# Altium PCB V2.pcbdoc
Units mil, origin at the board's own origin, x right, y up, seen from the top; angles counter-clockwise.
Board outline 2425 x 2622.79 mil, 2 copper layers (Top Layer, Bottom Layer); 56 components, 61 nets, 216 pads, 43 vias.
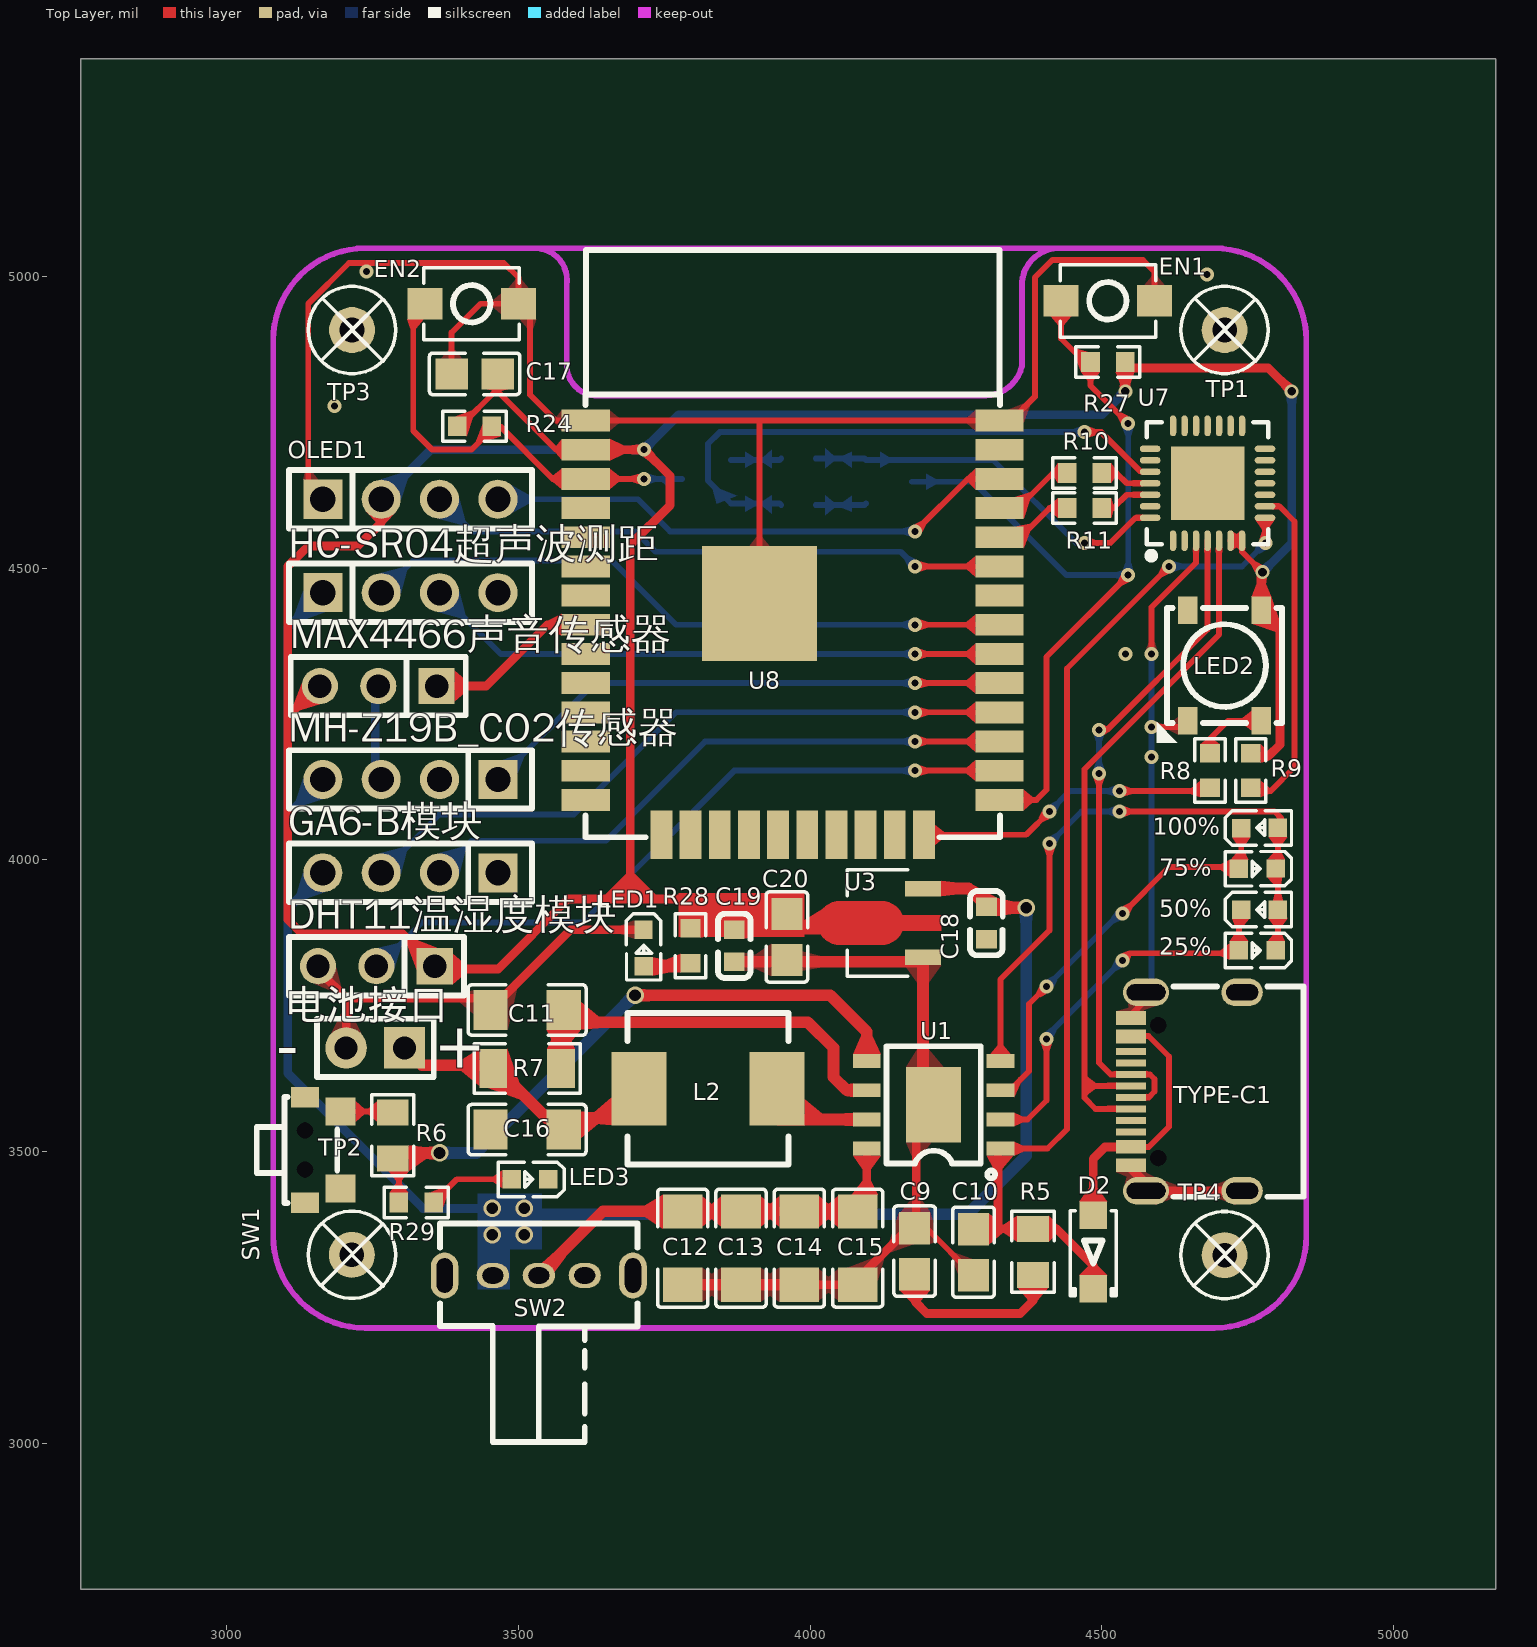
[diagram p0: Top Layer view]
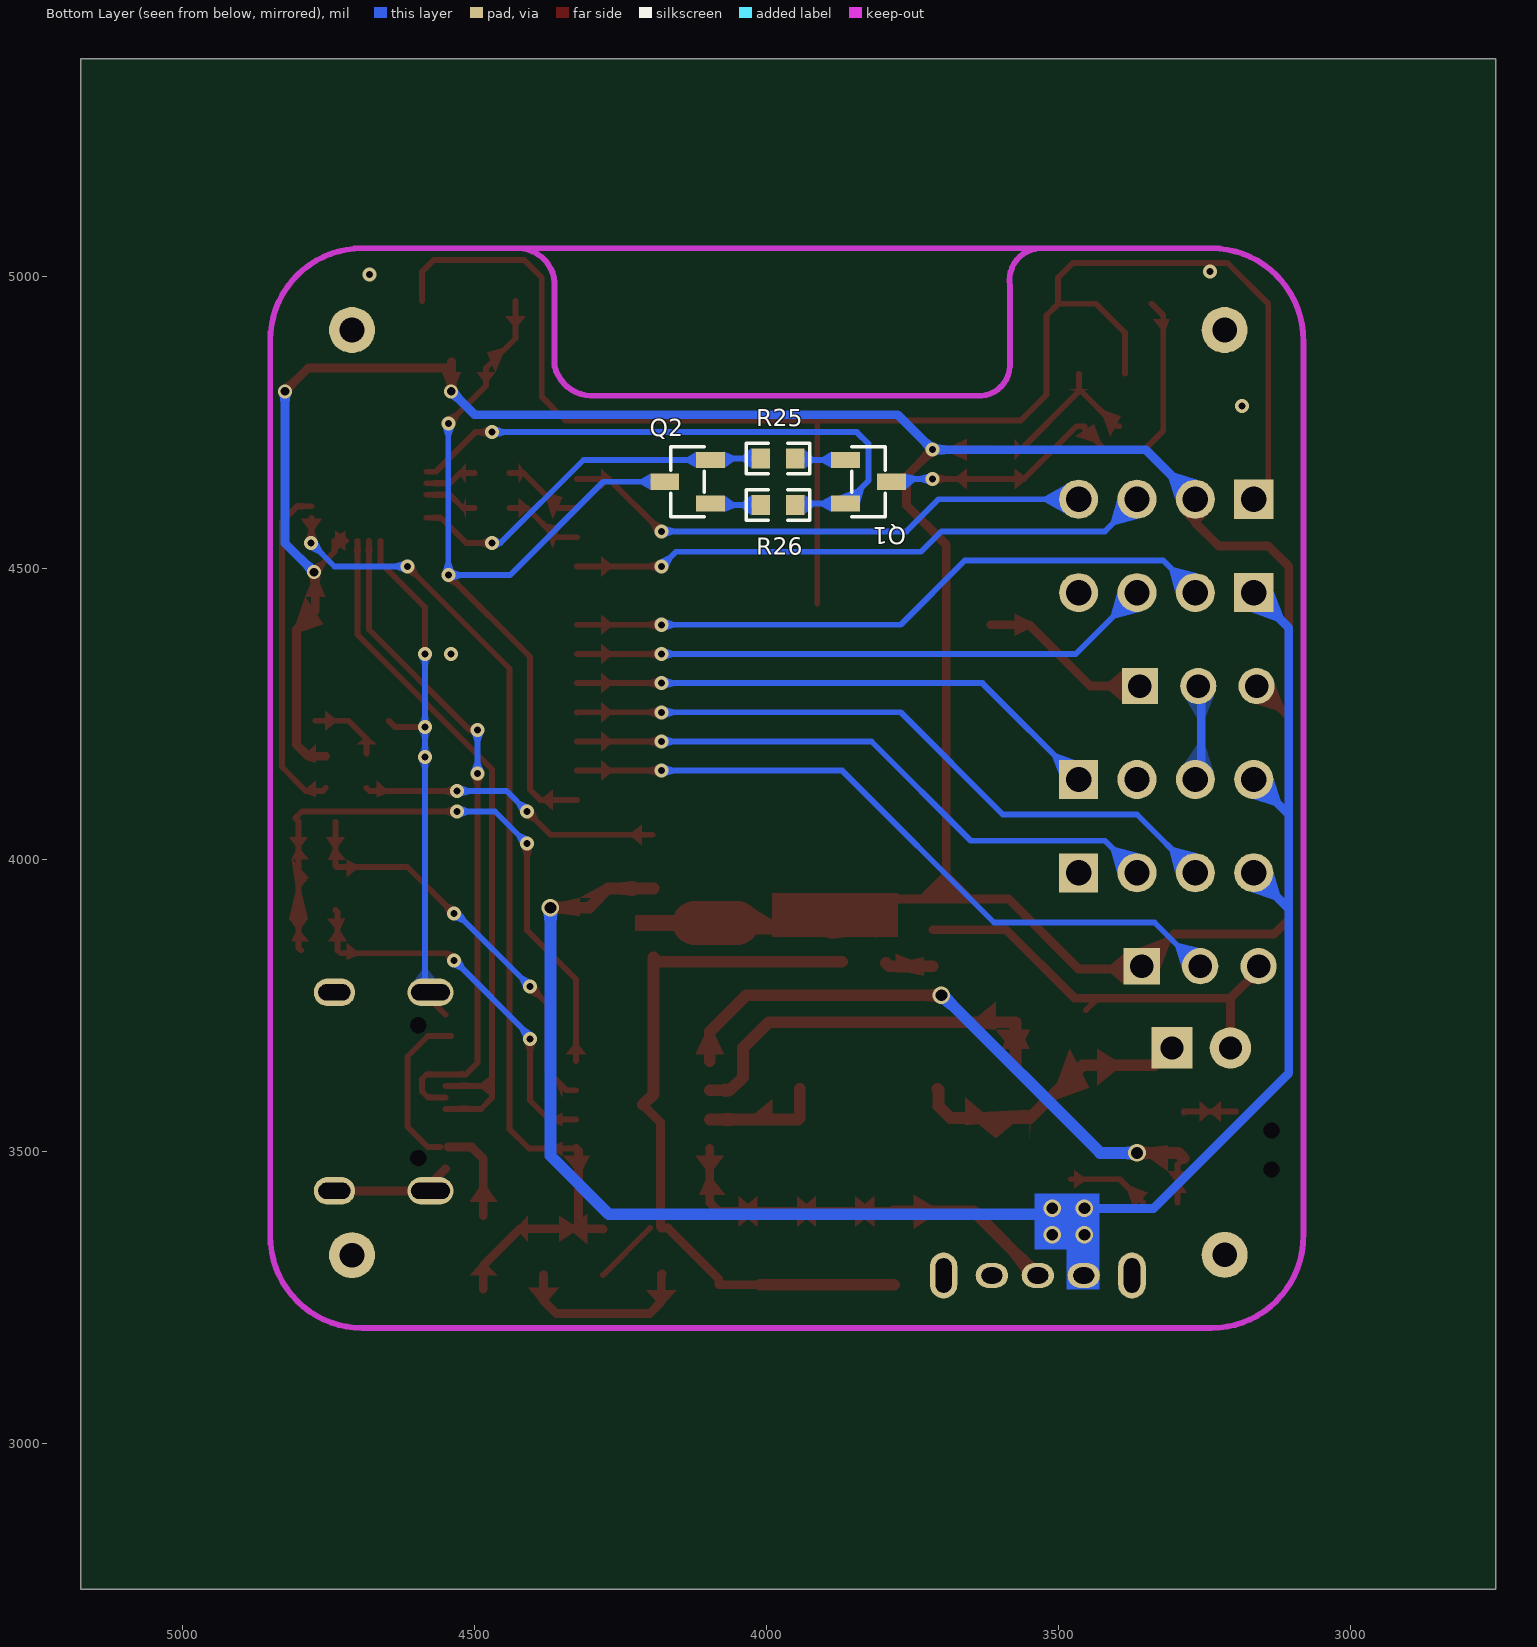
[diagram p1: Bottom Layer view, seen from below]

## Layer stack, top to bottom
Top Layer: signal copper (thickness not stored)
Dielectric: dielectric 12.6, FR-4, Dk 4.8
Bottom Layer: signal copper (thickness not stored)

## Board outline
5175,2750 2750,2750 2750,5372.79 5175,5372.79

## Components (designator, comment, footprint, x,y, rotation, side; value= is the part's Value field where it differs from the comment)
25% "19-217/GHC-YR1S2/3T" LED0603-RD 4766.1,3844.95 r180 top
50% "19-217/GHC-YR1S2/3T" LED0603-RD 4770,3914.53 r0 top
75% "19-217/GHC-YR1S2/3T" LED0603-RD 4766.1,3984.95 r180 top
100% "19-217/GHC-YR1S2/3T" LED0603-RD 4770,4054.53 r0 top
C9 "GRM21BR61H106KE43L" C0805 4179.07,3329.61 r270 top
C10 "GRM21BR61H106KE43L" C0805 4280,3327.79 r90 top
C11 "C3216X5R1V226MTJ00E" C1206 3515,3742.79 r0 top
C12 "C3216X5R1V226MTJ00E" C1206 3781.45,3334.61 r90 top
C13 "C3216X5R1V226MTJ00E" C1206 3881.45,3334.61 r90 top
C14 "C3216X5R1V226MTJ00E" C1206 3981.45,3334.61 r90 top
C15 "C3216X5R1V226MTJ00E" C1206 4081.45,3334.61 r90 top
C16 "C3216X5R1V226MTJ00E" C1206 3515,3537.79 r0 top
C17 "GRM21BR61H106KE43L" C0805 3425,4832.79 r180 top
C18 "104" C0603 4302.07,3891.75 r90 top
C19 "104" C0603 3870,3852.79 r90 top
C20 "GRM21BR61H106KE43L" C0805 3960,3867.79 r90 top
D2 "SS14_C2909920" SOD-123FL_L2.8-W1.8-LS3.7-RD 4485,3327.79 r90 top
DHT11温湿度模块 "B-2200S03P-A120" HDR-TH_3P-P2.54-V-F 3256.73,3817.79 r180 top
EN1 "TSA343G00-250J2" SW-SMD_L4.0-W2.9-LS5.0 4510,4957.79 r0 top
EN2 "TSA343G00-250J2" SW-SMD_L4.0-W2.9-LS5.0 3420,4952.79 r0 top
GA6-B模块 "2.54-1*4P母" HDR-TH_4P-P2.54-V-F 3315,3977.79 r180 top
HC-SR04超声波测距 "2.54-1*4P母" HDR-TH_4P-P2.54-V-F 3315,4457.79 r0 top
L2 "FXL0618-1R0-M" IND-SMD_L7.0-W6.6 3825,3607.79 r180 top
LED1 "19-217/GHC-YR1S2/3T" LED0603-RD 3714.58,3848.89 r270 top
LED2 "WS2812B-V5/W" LED-SMD_L5.0-W5.0-P3.20-LS5.4-TL 4710,4332.79 r270 top
LED3 "19-217/GHC-YR1S2/3T" LED0603-RD 3520,3452.79 r180 top
MAX4466声音传感器 "B-2200S03P-A120" HDR-TH_3P-P2.54-V-F 3260,4297.79 r180 top
MH-Z19B_CO2传感器 "2.54-1*4P母" HDR-TH_4P-P2.54-V-F 3315,4137.79 r180 top
OLED1 "2.54-1*4P母" HDR-TH_4P-P2.54-V-F 3315,4617.79 r0 top
Q1 "S8050" SOT-23-3_L2.9-W1.3-P1.90-LS2.4-BR 3825,4647.79 r0 bottom
Q2 "S8050" SOT-23-3_L2.9-W1.3-P1.90-LS2.4-BR 4135,4647.79 r180 bottom
R5 "0805W8F200KT5E" R0805 4381.88,3328.35 r90 top
R6 "0805W8F1002T5E_C17414" R0805 3285,3527.79 r270 top
R7 "1206W4F500LT5E" R1206 3515,3642.79 r180 top
R8 "0603WAF0000T5E" R0603 4685,4152.79 r270 top
R9 "0603WAF4701T5E" R0603 4755,4152.79 r270 top
R10 "0603WAF1001T5E" R0603 4470,4662.79 r180 top
R11 "0603WAF1001T5E" R0603 4470,4602.79 r180 top
R24 "0603WAF1002T5E" R0603 3425,4742.79 r0 top
R25 "0603WAF1002T5E" R0603 3980,4687.79 r0 bottom
R26 "0603WAF1002T5E" R0603 3980,4607.79 r180 bottom
R27 "0603WAF1002T5E" R0603 4510,4852.79 r0 top
R28 "0603WAF1001T5E" R0603 3795,3852.79 r90 top
R29 "0603WAF200JT5E" R0603 3325,3412.79 r180 top
SW1 "TS24CA" SW-SMD_TS24CA 3165,3502.79 r90 top
SW2 "SK-12D02-VG5_C136722" SW-TH_SK-12D02-VG5 3535,3287.79 r0 top
TP1 "M2螺丝" M2螺丝 4710,4907.79 r0 top
TP2 "M2螺丝" M2螺丝 3214.8,3323.14 r0 top
TP3 "M2螺丝" M2螺丝 3215,4907.79 r0 top
TP4 "M2螺丝" M2螺丝 4710,3322.79 r0 top
TYPE-C1 "KH-TYPE-C-16P" USB-C-SMD_KH-TYPE-C-16P 4645,3602.79 r90 top
U1 "IP5306" ESOP-8_L4.9-W3.9-P1.27-LS6.0-BL-EP 4211.59,3580.2 r90 top
U3 "AMS1117-3.3_C880752" SOT-89-3_L4.5-W2.5-P1.50-LS4.2-BR 4139.95,3891.77 r0 top
U7 "CP2102-GMR" WQFN-28_L5.0-W5.0-P0.50-BL-EP3.2 4680.88,4645.2 r0 top
U8 "ESP32-WROOM-32D" WIFIM-SMD_ESP32-WROOM-32D 3970,4397.79 r270 top
电池接口 "826629-2" HDR-TH_2P-P2.54-V-M-1 3255,3677.79 r180 top

## Footprints (in the part's own frame and the unit in brackets; to place one, negate y for a bottom-side part, rotate by r counter-clockwise, add the part's x,y. Pads: shape width x height; smd on the part's side, far side on the other; paste and mask are expansions set on the pad)
C0603 [mm]
  rect 0.8x0.9 smd paste+0 mask+0.051: 1(-0.7,0) 2(0.7,0)
  silkscreen extent -1.41,-0.71 1.39,0.72
C0805 [mm]
  rect 1.41x1.35 smd paste-100 mask+0.051: 1(-1,0) 2(1,0)
  silkscreen extent -1.96,-0.9 1.96,0.9
C1206 [mm]
  rect 1.485x1.728 smd paste-100 mask+0.051: 1(-1.593,0) 2(1.593,0)
  silkscreen extent -2.56,-1.09 2.56,1.09
ESOP-8_L4.9-W3.9-P1.27-LS6.0-BL-EP [mm]
  rect 0.6x1.2 smd paste+0 mask+0.051: 1(-1.905,-2.908) 2(-0.635,-2.908) 3(0.635,-2.908) 4(1.905,-2.908) 5(1.905,2.908) 6(0.635,2.908) 7(-0.635,2.908) 8(-1.905,2.908)
  rect 3.3x2.4 smd paste+0 mask+0.051: 9(0,0)
  silkscreen extent -3.2,-2.67 2.55,2.05
HDR-TH_2P-P2.54-V-M-1 [mm]
  rect 1.8x1.8 hole 1 paste+0 mask+0.051: 1(-1.27,0)
  round 1.8 hole 1 paste+0 mask+0.051: 2(1.27,0)
  silkscreen extent -2.54,-1.27 2.54,1.27
HDR-TH_3P-P2.54-V-F [mil]
  rect 62x62 hole 40.16 paste+0 mask+2: 1(-100,0)
  round 62 hole 40.16 paste+0 mask+2: 2(0,0) 3(100,0)
  silkscreen extent -150,-50 150,50
HDR-TH_4P-P2.54-V-F [mm]
  rect 1.7x1.7 hole 1.1 paste+0 mask+0.051: 1(-3.81,0)
  round 1.7 hole 1.1 paste+0 mask+0.051: 2(-1.27,0) 3(1.27,0) 4(3.81,0)
  silkscreen extent -5.29,-1.27 5.29,1.27
IND-SMD_L7.0-W6.6 [mm]
  rect 2.4x3.2 smd paste+0 mask+0.051: 1(-3,0) 2(3,0)
  silkscreen extent -3.5,-3.3 3.5,3.3
LED0603-RD [mm]
  rect 0.8x0.8 smd paste+0 mask+0.051: 1(-0.799,-0.003) 2(0.799,0.003)
  silkscreen extent -1.49,-0.75 1.39,0.76
LED-SMD_L5.0-W5.0-P3.20-LS5.4-TL [mm]
  rect 1.2x0.85 smd paste+0 mask+0.051: 1(-2.4,1.6) 2(-2.4,-1.6) 3(2.4,1.6) 4(2.4,-1.6)
  silkscreen extent -2.5,-2.95 3.35,2.5
M2螺丝 [mm]
  round 2 hole 1.07 mask+0.051: 1(0,0)
  silkscreen extent -1.9,-1.9 1.9,1.9
R0603 [mil]
  rect 31.75x34.02 smd paste-3937.01 mask+2: 1(-29.66,0) 2(29.66,0)
  silkscreen extent -55,-26 55,26
R0805 [mm]
  rect 1.133x1.377 smd paste-100 mask+0.051: 1(-1,0) 2(1,0)
  silkscreen extent -1.76,-0.92 1.76,0.92
R1206 [mil]
  rect 47.54x66.97 smd paste-3937.01 mask+2: 1(-58.22,0) 2(58.22,0)
  silkscreen extent -91,-42 91,42
SOD-123FL_L2.8-W1.8-LS3.7-RD [mm]
  rect 1.2x1.2 smd paste+0 mask+0.051: 1(-1.6,0) 2(1.6,0)
  silkscreen extent -1.9,-1 1.8,1
SOT-23-3_L2.9-W1.3-P1.90-LS2.4-BR [mm]
  rect 1.25x0.7 smd paste+0 mask+0.051: 1(1,-0.95) 2(1,0.95) 3(-1,0)
  silkscreen extent -0.73,-1.53 0.73,1.53
SOT-89-3_L4.5-W2.5-P1.50-LS4.2-BR [mm]
  rect 1.575x0.672 smd paste+0 mask+0.051: 1(1.356,-1.5) 3(1.356,1.5)
  Top Layer region: -2.283,0.95 -0.429,0.95 -0.384,0.949 -0.34,0.946 -0.296,0.94 -0.252,0.933 -0.208,0.924 -0.165,0.912 -0.123,0.899 -0.081,0.884 -0.04,0.866 0,0.847 0.04,0.826 0.078,0.803 0.115,0.779 0.151,0.752 0.185,0.724 0.219,0.695 0.251,0.664 0.281,0.631 0.31,0.597 0.337,0.562 0.362,0.525 0.386,0.488 0.408,0.449 0.428,0.409 0.447,0.33 2.144,0.33 2.144,-0.33 0.447,-0.33 0.428,-0.409 0.408,-0.449 0.386,-0.488 0.362,-0.526 0.337,-0.562 0.31,-0.597 0.281,-0.631 0.251,-0.664 0.219,-0.695 0.185,-0.725 0.151,-0.753 0.115,-0.779 0.078,-0.804 0.04,-0.827 0,-0.848 -0.04,-0.867 -0.081,-0.884 -0.123,-0.899 -0.165,-0.913 -0.208,-0.924 -0.252,-0.934 -0.296,-0.941 -0.34,-0.946 -0.384,-0.949 -0.429,-0.95 -2.283,-0.95 -2.328,-0.949 -2.372,-0.946 -2.416,-0.941 -2.46,-0.934 -2.504,-0.924 -2.547,-0.913 -2.589,-0.899 -2.631,-0.884 -2.672,-0.867 -2.713,-0.848 -2.752,-0.827 -2.79,-0.804 -2.827,-0.779 -2.863,-0.753 -2.898,-0.725 -2.931,-0.695 -2.963,-0.664 -2.993,-0.631 -3.022,-0.597 -3.049,-0.562 -3.075,-0.526 -3.098,-0.488 -3.12,-0.449 -3.141,-0.409 -3.159,-0.369 -3.175,-0.327 -3.189,-0.285 -3.202,-0.242 -3.212,-0.199 -3.22,-0.155 -3.227,-0.111 -3.231,-0.067 -3.233,-0.022 -3.233,0.022 -3.231,0.067 -3.227,0.111 -3.22,0.155 -3.212,0.199 -3.202,0.242 -3.189,0.285 -3.175,0.327 -3.159,0.369 -3.141,0.409 -3.12,0.449 -3.098,0.488 -3.075,0.525 -3.049,0.562 -3.022,0.597 -2.993,0.631 -2.963,0.664 -2.931,0.695 -2.898,0.724 -2.863,0.752 -2.827,0.779 -2.79,0.803 -2.752,0.826 -2.713,0.847 -2.672,0.866 -2.631,0.884 -2.589,0.899 -2.547,0.912 -2.504,0.924 -2.46,0.933 -2.416,0.94 -2.372,0.946 -2.328,0.949
  silkscreen extent -1.95,-2.33 0.7,2.33
SW-SMD_L4.0-W2.9-LS5.0 [mm]
  rect 1.53x1.36 smd paste+0 mask+0.051: 1(-2.035,0) 2(2.035,0)
  silkscreen extent -2.08,-1.58 2.08,1.58
SW-SMD_TS24CA [mm]
  rect 0.9x1.2 smd paste+0 mask+0.051: 1(-2.3,0.775) 2(2.3,0.775)
  rect 1.2x1.3 smd paste+0 mask+0.051: 3(-1.675,-0.775) 4(1.675,-0.775)
  Multi-Layer board cut-out: -0.85,0.425 -0.698,0.46 -0.576,0.557 -0.509,0.697 -0.509,0.853 -0.576,0.993 -0.698,1.09 -0.85,1.125 -0.85,1.125 -1.002,1.09 -1.124,0.993 -1.191,0.853 -1.191,0.697 -1.124,0.557 -1.002,0.46 -0.85,0.425
  Multi-Layer board cut-out: 0.85,0.425 1.002,0.46 1.124,0.557 1.191,0.697 1.191,0.853 1.124,0.993 1.002,1.09 0.85,1.125 0.85,1.125 0.698,1.09 0.576,0.993 0.509,0.853 0.509,0.697 0.576,0.557 0.698,0.46 0.85,0.425
  silkscreen extent -2.3,-0.62 2.3,2.88
SW-TH_SK-12D02-VG5 [mm]
  oval 1.4x1.1 hole 0.7 slot 0.9 at 0 deg copper offset 0,0.001 paste+0 mask+0.051: 1(-2,-0.001)
  oval 1.4x1.1 hole 0.7 slot 0.9 at 0 deg paste+0 mask+0.051: 2(0,0)
  oval 1.4x1.1 hole 0.7 slot 0.9 at 0 deg copper offset 0,-0.001 paste+0 mask+0.051: 3(2,0.001)
  oval 1.2x2 hole 0.7 slot 1.5 at 90 deg copper offset 0.001,0 paste+0 mask+0.051: 4(4.099,0)
  oval 1.2x2 hole 0.7 slot 1.5 at 90 deg copper offset 0,0 paste+0 mask+0.051: 5(-4.1,0)
  silkscreen extent -4.3,-7.25 4.3,2.27
USB-C-SMD_KH-TYPE-C-16P [mm]
  oval 1.2x2 hole 0.7 slot 1.7 at 90 deg paste+0 mask+0.051: 1(-4.32,1.765) 2(4.32,1.765)
  oval 1.2x1.8 hole 0.7 slot 1.4 at 90 deg paste+0 mask+0.051: 3(-4.32,-2.415) 4(4.32,-2.415)
  rect 0.3x1.3 smd paste-100 mask+0.05: A1(-3.35,2.415) A4(-2.55,2.415) A5(-1.25,2.415) A6(-0.25,2.415) A7(0.25,2.415) A8(1.25,2.415) A9(2.55,2.415) A12(3.35,2.415) B1(3.05,2.415) B4(2.25,2.415) B5(1.75,2.415) B6(0.75,2.415) B7(-0.75,2.415) B8(-1.75,2.415) B9(-2.25,2.415) B12(-3.05,2.415)
  Multi-Layer board cut-out: -2.89,0.885 -2.738,0.92 -2.616,1.017 -2.549,1.157 -2.549,1.313 -2.616,1.453 -2.738,1.55 -2.89,1.585 -2.89,1.585 -3.042,1.55 -3.164,1.453 -3.231,1.313 -3.231,1.157 -3.164,1.017 -3.042,0.92 -2.89,0.885
  Multi-Layer board cut-out: 2.89,0.885 3.042,0.92 3.164,1.017 3.231,1.157 3.231,1.313 3.164,1.453 3.042,1.55 2.89,1.585 2.89,1.585 2.738,1.55 2.616,1.453 2.549,1.313 2.549,1.157 2.616,1.017 2.738,0.92 2.89,0.885
  silkscreen extent -4.57,-5.08 4.57,0.57
WIFIM-SMD_ESP32-WROOM-32D [mm]
  rect 0.95x2.1 smd paste+0 mask+0.051: 1(-9.015,-9) 2(-7.745,-9) 3(-6.475,-9) 4(-5.205,-9) 5(-3.935,-9) 6(-2.665,-9) 7(-1.395,-9) 8(-0.125,-9) 9(1.145,-9) 10(2.415,-9) 11(3.685,-9) 12(4.955,-9) 13(6.225,-9) 14(7.495,-9) 25(7.495,9) 26(6.225,9) 27(4.955,9) 28(3.685,9) 29(2.415,9) 30(1.145,9) 31(-0.125,9) 32(-1.395,9) 33(-2.665,9) 34(-3.935,9) 35(-5.205,9) 36(-6.475,9) 37(-7.745,9) 38(-9.015,9)
  rect 2.1x0.95 smd paste+0 mask+0.051: 15(9.015,-5.715) 16(9.015,-4.445) 17(9.015,-3.175) 18(9.015,-1.905) 19(9.015,-0.635) 20(9.015,0.635) 21(9.015,1.905) 22(9.015,3.175) 23(9.015,4.445) 24(9.015,5.715)
  rect 5x5 smd paste+0 mask+0.051: 39(-1.045,-1.45)
  silkscreen extent -16.44,-9.02 9.12,9.02
WQFN-28_L5.0-W5.0-P0.50-BL-EP3.2 [mm]
  oval 0.28x0.9 smd paste-100 mask+0.051: 1(-1.501,-2.5) 2(-1.001,-2.5) 3(-0.501,-2.5) 4(0,-2.5) 5(0.5,-2.5) 6(1.001,-2.5) 7(1.501,-2.5) 15(1.501,2.5) 16(1.001,2.5) 17(0.5,2.5) 18(0,2.5) 19(-0.501,2.5) 20(-1.001,2.5) 21(-1.501,2.5)
  oval 0.9x0.28 smd paste-100 mask+0.051: 8(2.5,-1.501) 9(2.5,-1.001) 10(2.5,-0.501) 11(2.5,0) 12(2.5,0.5) 13(2.5,1.001) 14(2.5,1.501) 22(-2.5,1.501) 23(-2.5,1.001) 24(-2.5,0.5) 25(-2.5,0) 26(-2.5,-0.501) 27(-2.5,-1.001) 28(-2.5,-1.501)
  rect 3.2x3.2 smd paste-100 mask+0.051: 29(0,0)
  silkscreen extent -2.65,-3.3 2.65,2.65

## Via types
v1: diameter 24, hole 12, Top Layer to Bottom Layer, 31 vias
v2: diameter 30, hole 20, Top Layer to Bottom Layer, 7 vias
v3: diameter 24, hole 15, Top Layer to Bottom Layer, 3 vias
v4: diameter 24.02, hole 12.01, Top Layer to Bottom Layer, 2 vias

## Nets (pads, with @x,y where several pads share a name; then routed paths per layer and width w, separated by ;. In a path a pad name is that pad's centre, name@x,y a point inside that pad or via, vN(x,y) a via of type N, cw(c..) or ccw(c..) an arc to the next point about the centre after c; other vN are vias at no path point)
3V3: C17.1 C19.2 C20.2 DHT11温湿度模块.1 LED2.1 MAX4466声音传感器.3 OLED1.2 R9.1 R24.1 R27.2 R28.2 U7.6 U7.7 U8.2 | length 5744.1
  Top Layer w10: R24.1 3400.34,4742.79 C17.1@3464.37,4806.82 ; C17.1 C17.1@3464.37,4806.82 ; U8.2 3564.33,4702.72 3464.37,4802.68 C17.1@3464.37,4806.82 ; U7.6 U7.7 4739.97,4527.82 v3(4775,4492.79) ; v3@4825,4797.79 v3(4825,4802.79)
  Top Layer w15: MAX4466声音传感器.3@3156.73,4297.79 3105,4246.06 ; OLED1.2 3265,4577.79 3225,4537.79 3140,4537.79 3105,4502.79 3105,4246.06 ; DHT11温湿度模块.1@3335,3812.79 3465,3812.79 3585,3932.79 3691.79,3932.79 ; DHT11温湿度模块.1 3301.73,3872.79 3130,3872.79 3105,3897.79 3105,4246.06 ; U8.2 3714.93,4702.72 v1(3715,4702.79) 3760,4657.79 3760,4607.79 3691.79,4539.59 3691.79,3932.79 ; 3810,3932.79 3691.79,3932.79 ; R27.2 R27.2@4539.66,4842.79 ; v3(4540,4802.79) 4539.66,4803.13 R27.2@4539.66,4842.79 ; R9.1@4755,4177.45 4785,4177.45 4805,4197.45 4805,4395.27 LED2.1 4772.99,4490.78 v3(4775,4492.79) ; v3(4825,4802.79) 4785,4842.79 R27.2@4539.66,4842.79
  Top Layer w20: R28.2 4077.24,3882.45 4086.55,3891.76
  Bottom Layer w15: OLED1.2 3350,4702.79 v1(3715,4702.79) 3775,4762.79 4500,4762.79 v3(4540,4802.79) ; v3(4775,4492.79) 4825,4542.79 v3(4825,4802.79)
5V: C10.2 D2.1 R5.2 U1.1 U7.8 | length 1805.2
  Top Layer w10: U1.1 4406.71,3505.2 4440,3538.49 4440,4327.79 v1(4615,4502.79) ; U7.8 4779.3,4537.79 4780,4538.49 v1(4780,4542.79)
  Top Layer w15: C10.2 4280.56,3367.72 R5.2 4422.07,3367.72 4485,3304.8 D2.1 ; 4321.88,3372.72 4321.88,3501 U1.1
  Bottom Layer w10: v1(4615,4502.79) 4740,4502.79 v1(4780,4542.79)
$1N562: C11.2 R7.1 U1.6 | length 680.5
  Top Layer w20: R7.1 3573.22,3721.81 3995.98,3721.81 4040,3677.79 4040,3627.79 4062.59,3605.2 U1.6
$1N563: L2.1 U1.7 | length 205.1
  Top Layer w20: L2.1 3943.11,3557.79 3945.69,3555.2 U1.7
$1N566: C9.2 R5.1 | length 311.4
  Top Layer w15: C9.2 4180,3289.31 4180,3242.79 4200,3222.79 4360,3222.79 4381.88,3244.67 R5.1
$1N567: 25%.2 50%.1 U1.2 | length 656.2
  Top Layer w10: U1.2 4372.41,3555.2 4405,3587.79 v1(4405,3692.79) ; v1(4535,3827.79) 4547.03,3839.82 25%.2@4728.72,3839.82 ; 25%.2 4734.62,3910.49 50%.1
  Bottom Layer w10: v1(4405,3692.79) 4405,3697.79 v1(4535,3827.79)
$1N568: 75%.2 100%.1 U1.3 | length 714.8
  Top Layer w10: U1.3 4342.41,3605.2 4375,3637.79 4375,3752.79 v1(4405,3782.79) ; v1(4535,3907.79) 4615,3987.79 4736.7,3987.79 75%.2@4738.72,3989.82 ; 75%.2@4738.52,3989.82 100%.1 100%.1@4738.52,4065.29
  Bottom Layer w10: v1(4405,3782.79) 4530,3907.79 v1(4535,3907.79)
$1N569: 25%.1 50%.2 75%.1 100%.2 U1.4 | length 1062.2
  Top Layer w10: U1.4 4326.09,3795.2 4410,3879.11 v1(4410,4027.79) ; v1(4530,4082.79) 4795.58,4082.79 4807.14,4071.23 4801.67,4065.76 4801.67,3849.19 25%.1
  Bottom Layer w10: v1(4410,4027.79) 4465,4082.79 v1(4530,4082.79)
$1N4383: R9.2 U7.9 | length 576.3
  Top Layer w10: R9.2 4760,4118.13 4789.14,4118.13 4830,4158.99 4830,4579.82 4804.02,4605.8 U7.9
$1N4471: R10.1 U7.25 | length 90.1
  Top Layer w10: R10.1 4524.66,4662.79 4542.25,4645.2 U7.25
$1N4541: R11.1 U7.26 | length 92.2
  Top Layer w10: R11.1 4519.66,4602.79 4542.37,4625.5 U7.26
$1N5646: Q1.1 R25.1 | length 87
  Bottom Layer w10: Q1.1 3947.74,4685.19 R25.1
$1N5682: Q2.1 R26.1 | length 87
  Bottom Layer w10: R26.1 4093.03,4607.79 Q2.1
$1N8242: LED1.2 R28.1 | length 82.7
  Top Layer w20: LED1.2 3789.28,3817.41 R28.1
$1N8352: LED2.3 R8.1 | length 125.8
  Top Layer w10: R8.1 4685,4207.45 4715.85,4238.3 LED2.3
$1N18037: R6.1 SW1.4 | length 91.1
  Top Layer w10: SW1.4 3285,3568.74 R6.1
$1N20998: LED3.2 R29.1 | length 140.5
  Top Layer w10: R29.1 3394.66,3452.79 3478.39,3452.79 LED3.2@3478.53,3452.66
$1N21037: R6.2 R29.2 U1.5 | length 1083.6
  Top Layer w10: R6.2 3295.34,3478.08 R29.2
  Top Layer w20: R6.2 3294.37,3497.79 v2(3365,3497.79) ; v2(3700,3767.79) 4034.5,3767.79 4097.09,3705.2 U1.5
  Bottom Layer w20: v2(3365,3497.79) 3428.28,3497.79 3698.28,3767.79 v2(3700,3767.79)
$1N21123: C12.2 C13.2 C14.2 C15.2 SW2.2 U1.8 | length 706.6
  Top Layer w15: C12.2 C13.2 C14.2 C15.2 4097.09,3412.95 U1.8
  Top Layer w20: SW2.2 3645.01,3397.79 3780.97,3397.79 C12.2
CLK: U8.20
CMD: U8.19
D+: TYPE-C1.A6 TYPE-C1.B6 U7.4 | length 1152.1
  Top Layer w10: v4(4495,4147.79) 4495,3652.24 4514.92,3632.32 TYPE-C1.B6 4582.2,3632.32 4590,3624.52 4590,3602.95 4580,3592.95 TYPE-C1.A6 ; v4(4495,4222.79) 4509.14,4222.79 4680.87,4394.52 U7.4
  Bottom Layer w10: v4(4495,4147.79) v4(4495,4222.79)
D-: TYPE-C1.A7 TYPE-C1.B7 U7.5 | length 1217.7
  Top Layer w10: TYPE-C1.B7 4489,3573.26 4470,3592.26 4470,3612.63 ; TYPE-C1.A7 4470,3612.63 ; U7.5 4700.57,4385.88 4470,4155.31 4470,3612.63
DTR: Q2.2 R25.2 U7.28 | length 650.8
  Top Layer w10: v1(4470,4542.79) 4514.15,4542.79 4557.45,4586.1 U7.28
  Bottom Layer w10: R25.2 4093.03,4687.79 Q2.2 4313.46,4685.19 4455.86,4542.79 v1(4470,4542.79)
EN: EN2.1 Q1.3 R24.2 U8.3 | length 751.6
  Top Layer w10: EN2.1 3320,4932.91 3320,4735.33 3352.54,4702.79 3419.66,4702.79 3454.66,4737.79 R24.2 3468.8,4742.79 3558.88,4652.72 U8.3 v1@3710,4652.72
  Bottom Layer w10: v1(3715,4652.79) Q1.3@3780.63,4652.79
GND: C9.1 C10.1 C11.1 C12.1 C13.1 C14.1 C15.1 C16.1 C17.2 C18.1 C19.1 C20.1 DHT11温湿度模块.3 EN1.2 EN2.2 GA6-B模块.1 HC-SR04超声波测距.4 LED1.1 LED2.4 LED3.1 MAX4466声音传感器.2 MH-Z19B_CO2传感器.3 OLED1.1 SW1.3 TYPE-C1.1 TYPE-C1.2 TYPE-C1.3 TYPE-C1.4 TYPE-C1.A1 TYPE-C1.A12 TYPE-C1.B1 TYPE-C1.B12 U1.9 U3.1 U7.3 U8.1 U8.15 U8.38 U8.39 电池接口.2 | length 6265.2
  Top Layer w10: OLED1.1 3140,4642.79 3140,4952.79 3210,5022.79 3475,5022.79 3500.12,4997.67 EN2.2 ; C17.2 3385.63,4903.3 3435.12,4952.79 EN2.2 ; C11.1@3433.54,3762.79 3437.3,3759.03 3437.3,3757.79 C11.1 ; U8.39 3912.93,4752.24 3912.45,4752.72 ; C9.1@4199.44,3368.98 C10.1 ; TYPE-C1.A12 4575.51,3760.27 TYPE-C1.2 ; v1(4585,4227.31) 4636.02,4227.31 LED2.4 ; v1(4585,4352.79) 4585,4432.79 4661.17,4508.97 U7.3 ; EN1.2 4590,4957.91 4590,5007.79 4570,5027.79 4415,5027.79 4385,4997.79 4385,4793.39 4344.32,4752.72 U8.38 3912.45,4752.72 ; EN2.2 3520.12,4932.79 3520.12,4796.9 3564.3,4752.72 U8.1 3912.45,4752.72
  Top Layer w15: DHT11温湿度模块.3@3160,3807.79 3205,3762.79 ; 电池接口.2 3205,3762.79 ; LED1.1 3589.44,3880.36 3471.87,3762.79 3433.54,3762.79 3205,3762.79 ; C14.1@4010.49,3271.91 C15.1 4081.45,3281.91 4168.52,3368.98 C9.1 4181.59,3371.51 4181.59,3550.2 U1.9 ; TYPE-C1.A1 4586.81,3434.01 TYPE-C1.1@4585.51,3432.71 ; TYPE-C1.1 TYPE-C1.1@4585.51,3432.71 ; TYPE-C1.3 TYPE-C1.1@4585.51,3432.71
  Top Layer w20: C12.1 C13.1 C14.1@4010.49,3271.91 ; C19.1 4185.86,3825.23 U3.1 4193.35,3598.45 U1.9
  Bottom Layer w10: TYPE-C1.2 4585,3782.36 v1(4585,4176.25) v1(4585,4227.31) v1(4585,4352.79)
  Bottom Layer w15: MAX4466声音传感器.2@3256.73,4297.79 3255,4296.06 3255,4147.79 MH-Z19B_CO2传感器.3
  other v1: 4540,4352.79 3185,4777.79 4680,5002.79 3240,5007.79
IO0: EN1.1 Q2.3 R27.1 U8.25 | length 1468.2
  Top Layer w10: U8.25 4387.66,4102.72 4405,4120.05 4405,4347.79 v1(4545,4487.79) ; EN1.1 4429.88,4893.25 4480.34,4842.79 4480.34,4812.45 v1(4545,4747.79)
  Bottom Layer w10: Q2.3 4279.37,4647.79 4439.37,4487.79 v1(4545,4487.79) v1(4545,4747.79)
IO2: R8.2 U8.24 | length 523.2
  Top Layer w10: U8.24 4370.09,4042.88 v1(4410,4082.79) ; v1(4530,4117.79) 4679.66,4117.79 R8.2
  Bottom Layer w10: v1(4410,4082.79) 4445,4117.79 v1(4530,4117.79)
IO4: DHT11温湿度模块.2 U8.26 | length 1210.2
  Top Layer w10: v1(4180,4152.79) 4324.25,4152.79 U8.26
  Bottom Layer w10: DHT11温湿度模块.2@3255,3812.79 3335,3892.79 3610,3892.79 3870,4152.79 v1(4180,4152.79)
IO5: MH-Z19B_CO2传感器.1 U8.29 | length 927.7
  Top Layer w10: v1(4180,4302.79) 4324.25,4302.79 U8.29
  Bottom Layer w10: MH-Z19B_CO2传感器.1 3630,4302.79 v1(4180,4302.79)
IO12: U8.14
IO13: U8.16
IO14: U8.13
IO15: U8.23
IO16: GA6-B模块.2 U8.27 | length 1052.6
  Top Layer w10: v1(4180,4202.79) 4180.07,4202.72 U8.27
  Bottom Layer w10: GA6-B模块.2 3420,4032.79 3650,4032.79 3820,4202.79 v1(4180,4202.79)
IO17: GA6-B模块.3 U8.28 | length 1173.3
  Top Layer w10: v1(4180,4252.79) 4324.25,4252.79 U8.28
  Bottom Layer w10: GA6-B模块.3 3365,4077.79 3595,4077.79 3770,4252.79 v1(4180,4252.79)
IO18: HC-SR04超声波测距.3 U8.30 | length 1002.8
  Top Layer w10: v1(4180,4352.79) 4324.25,4352.79 U8.30
  Bottom Layer w10: HC-SR04超声波测距.3 3470,4352.79 v1(4180,4352.79)
IO19: HC-SR04超声波测距.2 U8.31 | length 1127.7
  Top Layer w10: v1(4180,4402.79) 4324.25,4402.79 U8.31
  Bottom Layer w10: HC-SR04超声波测距.2 3320,4512.79 3660,4512.79 3770,4402.79 v1(4180,4402.79)
IO21: OLED1.3 U8.33 | length 1007
  Top Layer w10: v1(4180,4502.79) 4324.25,4502.79 U8.33
  Bottom Layer w10: OLED1.3 3420,4562.79 3700,4562.79 3735,4527.79 4155,4527.79 v1(4180,4502.79)
IO22: OLED1.4 U8.36 | length 919.4
  Top Layer w10: v1(4180,4562.79) 4269.93,4652.72 U8.36
  Bottom Layer w10: OLED1.4 3705,4617.79 3760,4562.79 v1(4180,4562.79)
IO23: U8.37
IO25: U8.10
IO26: U8.11
IO27: U8.12
IO32: MAX4466声音传感器.1 U8.8 | length 299.1
  Top Layer w15: MAX4466声音传感器.1 3444.91,4297.79 3549.84,4402.72 U8.8
IO33: U8.9
IO34: U8.6
IO35: U8.7
RTS: Q1.2 R26.2 U7.24 | length 999.6
  Top Layer w10: v1(4470,4732.79) 4498.73,4732.79 4566.62,4664.9 U7.24
  Bottom Layer w10: R26.2 3947.74,4610.39 Q1.2 3825,4649.76 3825,4712.79 3845,4732.79 v1(4470,4732.79)
RXD0: R11.2 U8.34 | length 136.8
  Top Layer w10: U8.34 4360.27,4552.72 4410.34,4602.79 R11.2
SD0: U8.21
SD1: U8.22
SD2: U8.17
SD3: U8.18
TXD0: R10.2 U8.35 | length 140.9
  Top Layer w10: U8.35 4356.12,4602.72 4416.2,4662.79 R10.2
VBUS: D2.2 TYPE-C1.A4 TYPE-C1.A9 TYPE-C1.B4 TYPE-C1.B9 | length 446
  Top Layer w10: TYPE-C1.A9@4539.93,3698.19 4579.78,3698.19 4615,3662.97 4615,3542.55 4580.24,3507.79 TYPE-C1.A4@4558.26,3507.79
  Top Layer w15: D2.2 4485,3487.79 4505,3507.79 TYPE-C1.A4@4544.53,3507.79
VCCBAT: C16.2 L2.2 R7.2 电池接口.1 | length 488.8
  Top Layer w20: 电池接口.1 3335,3647.79 3457.7,3647.79 3547.7,3557.79 3685,3557.79 3705,3577.79 3705,3605.91 L2.2
VIN: C18.2 GA6-B模块.4 HC-SR04超声波测距.1 MH-Z19B_CO2传感器.4 SW2.1 U3.3 | length 3097.8
  Top Layer w20: U3.3 4271.35,3950.82 4302.07,3920.1 C18.2 4303.6,3917.79 v2(4370,3917.79)
  Bottom Layer w15: GA6-B模块.4 3165,3976.13 3105,3916.13 ; MH-Z19B_CO2传感器.4 3105,4077.79 ; HC-SR04超声波测距.1 3105,4397.79 3105,4077.79 ; SW2.1 3456.26,3337.79 ; v2@3510,3392.79 v2(3510,3402.79) v2(3455,3402.79) 3336.52,3402.79 3105,3634.31 3105,3916.13 ; 3105,3916.13 3105,4077.79
  Bottom Layer w20: v2@3510,3392.79 4270,3392.79 4370,3492.79 v2(4370,3917.79)
  other v2: 3455,3357.79 3510,3357.79
VN: U8.5
VP: U8.4
"": LED2.2 MH-Z19B_CO2传感器.2 SW1.1 SW1.2 SW2.3 SW2.4 SW2.5 TP1.1 TP2.1 TP3.1 TP4.1 TYPE-C1.A5 TYPE-C1.A8 TYPE-C1.B5 TYPE-C1.B8 U7.1 U7.2 U7.10 U7.11 U7.12 U7.13 U7.14 U7.15 U7.16 U7.17 U7.18 U7.19 U7.20 U7.21 U7.22 U7.23 U7.27 U7.29 U8.32

## Polygon pours and split planes (outlines as drawn)
GND on Top Layer (solid, remove dead copper, pour order 0): 3000,3122.79 4925,3122.79 4925,5122.79 3000,5122.79
GND on Bottom Layer (solid, remove dead copper, pour order 1): 3005,3127.79 4920,3127.79 4920,5117.79 3005,5117.79

## Keep-outs
Board Outline Layer:
  lines w10 net "": 3525,5047.79 cw(c3528.75,4993.19) 3582.88,4985.17 3582.88,4845.17 ccw(c3635.52,4847.71) 3638.55,4795.1 ; 3637.88,4795.1 4297.88,4795.1 ; 4292.88,4795.17 ccw(c4297.98,4862.04) 4362.88,4845.17 ; 4362.88,4845.53 4362.88,4985.53 ; 4362.88,4980.17 cw(c4425.92,4984.61) 4425,5047.79 ; 3080,3355.27 ccw(c3237.48,3355.27) 3237.48,3197.79 4692.52,3197.79 ccw(c4692.52,3355.27) 4850,3355.27 4850,4890.31 ccw(c4692.52,4890.31) 4692.52,5047.79 3237.48,5047.79 ccw(c3237.48,4890.31) 3080,4890.31 3080,3355.27

## Other copper
Top Layer:
  region net 3V3: 3775,3867.79 3990,3867.79 3990,3942.79 3775,3942.79
  region net D-: 4470,3632.79 4495,3612.79 4470,3592.79
  region net 3V3: 3641.28,3932.79 3691.79,3983.31 3691.79,3983.81 3742.81,3932.79
  region net $1N566: 4172.5,3242.79 4187.5,3242.79 4205.64,3262.49 4153.75,3262.49
  region net 5V: 4329.07,3360.22 4329.07,3375.22 4306.57,3393.97 4306.57,3341.47
  region net 5V: 4332.28,3360.22 4354.78,3345.43 4354.78,3390.02 4332.28,3375.22
  region net 5V: 4422.07,3360.22 4422.07,3375.22 4408.99,3390.02 4408.99,3345.43
  region net $1N566: 4389.38,3244.67 4408.13,3266.69 4355.63,3266.69 4374.38,3244.67
  region net $1N567: 4703.87,3844.82 4703.87,3834.82 4718.87,3829.07 4718.87,3857.32
  region net $1N567: 4729.62,3875.57 4718.87,3860.57 4750.37,3860.57 4739.62,3875.57
  region net $1N569: 4806.67,3875.84 4796.67,3875.84 4784.17,3860.84 4813.32,3860.84
  region net $1N569: 4806.67,3945.41 4796.67,3945.41 4785.73,3898.92 4817.22,3898.92
  region net $1N569: 4806.67,3883.92 4817.22,3898.92 4785.73,3898.92 4796.67,3883.92
  region net $1N567: 4729.62,3883.65 4739.62,3883.65 4752.12,3898.65 4722.78,3898.65
  region net $1N568: 4703.87,3992.79 4703.87,3982.79 4718.87,3970.29 4718.87,4000.57
  region net $1N568: 4733.52,4015.57 4721.02,4000.57 4750.37,4000.57 4743.52,4015.57
  region net $1N569: 4806.67,4015.84 4796.67,4015.84 4784.17,4000.84 4813.32,4000.84
  region net $1N569: 4806.67,3954.34 4813.32,4000.84 4784.17,3969.34 4796.67,3954.34
  region net $1N569: 4806.67,4023.92 4817.22,4038.92 4785.73,4038.92 4796.67,4023.92
  region net $1N568: 4733.52,4023.65 4743.52,4023.65 4754.27,4038.65 4722.78,4038.65
  region net 5V: 4314.38,3470.89 4329.38,3470.89 4348.13,3493.39 4302.47,3493.39
  region net 5V: 4364.71,3510.2 4349.71,3517.01 4349.71,3493.39 4364.71,3500.2
  region net $1N567: 4364.71,3550.2 4364.71,3560.2 4349.71,3567.01 4349.71,3543.39
  region net $1N568: 4360.32,3616.04 4357.76,3627.62 4349.71,3617.01 4349.71,3593.39
  region net $1N569: 4321.09,3682.01 4308.59,3667.01 4343.59,3667.01 4331.09,3682.01
  region net $1N21037: 4107.09,3697.01 4087.09,3697.01 4073.47,3667.01 4120.71,3667.01
  region net $1N562: 4062.59,3595.2 4073.47,3593.39 4073.47,3617.01 4062.59,3615.2
  region net $1N563: 4043.47,3565.2 4043.47,3545.2 4073.47,3543.39 4073.47,3567.01
  region net $1N21123: 4104.59,3470.89 4120.71,3493.39 4073.47,3493.39 4089.59,3470.89
  region net $1N21037: 3290.34,3451.13 3300.34,3451.13 3312.11,3466.13 3277.84,3466.13
  region net $1N21037: 3342.11,3487.79 3342.11,3507.79 3312.11,3510.72 3312.11,3466.13
  region net $1N18037: 3242.89,3573.74 3242.89,3563.74 3257.89,3551.24 3257.89,3586.24
  region net $1N562: 3583.22,3678.78 3606.93,3708.78 3548.47,3708.78 3563.22,3678.78
  region net $1N562: 3636.93,3711.81 3636.93,3731.81 3606.93,3756.81 3606.93,3708.78
  region net $1N21123: 3837.97,3404.81 3815.47,3423.56 3815.47,3371.06 3837.97,3389.81
  region net $1N21123: 3717.43,3407.79 3717.43,3387.79 3747.43,3368.08 3747.43,3426.55
  region net $1N21123: 3937.97,3404.81 3915.47,3423.56 3915.47,3371.06 3937.97,3389.81
  region net $1N21123: 3824.93,3404.81 3824.93,3389.81 3847.43,3371.06 3847.43,3423.56
  region net $1N21123: 3924.93,3404.81 3924.93,3389.81 3947.43,3371.06 3947.43,3423.56
  region net $1N21123: 4037.97,3404.81 4015.47,3423.56 4015.47,3371.06 4037.97,3389.81
  region net $1N21123: 4024.93,3404.81 4024.93,3389.81 4047.43,3371.06 4047.43,3423.56
  region net $1N21123: 4104.59,3449.05 4089.59,3449.05 4070.84,3426.55 4115.47,3426.55
  region net $1N563: 4020.35,3565.2 3990.35,3590.2 3990.35,3544.8 4020.35,3545.2
  region net VCCBAT: 3629.64,3567.79 3629.64,3547.79 3659.64,3544.8 3659.64,3592.79
  region net VCCBAT: 3501.76,3617.87 3480.55,3676.28 3446.69,3609.31 3501.76,3589.59
  region net VCCBAT: 3403.01,3657.79 3403.01,3637.79 3433.01,3612.79 3433.01,3676.28
  region net $1N562: 3583.22,3706.28 3563.22,3706.28 3549.45,3676.28 3596.99,3676.28
  region net VCCBAT: 3547.7,3567.79 3547.7,3547.79 3548.47,3522.79 3548.47,3571.81
  region net VCCBAT: 3636.93,3567.79 3548.47,3571.81 3606.93,3522.79 3636.93,3547.79
  region net $1N18037: 3236.1,3573.74 3221.1,3586.24 3221.1,3551.24 3236.1,3563.74
  region net 3V3: 3469.37,4802.68 3481.87,4806.22 3446.87,4806.22 3459.37,4802.68
  region net $1N4383: 4787.01,4123.13 4772.01,4135.63 4772.01,4107.26 4787.01,4113.13
  region net 3V3: 4785,4184.95 4772.01,4198.33 4772.01,4166.58 4785,4169.95
  region net TXD0: 4416.2,4657.79 4424.46,4645.78 4424.46,4679.8 4416.2,4667.79
  region net $1N4471: 4524.66,4667.79 4515.54,4679.8 4515.54,4645.78 4524.66,4657.79
  region net RXD0: 4410.34,4597.79 4424.46,4585.78 4424.46,4619.8 4410.34,4607.79
  region net $1N4541: 4519.66,4607.79 4515.54,4619.8 4515.54,4585.78 4519.66,4597.79
  region net EN: 3439.12,4715.18 3470.54,4725.78 3438.78,4746.66 3428.18,4718.38
  region net 3V3: 3421.82,4757.2 3420.88,4770.41 3392.6,4759.8 3411.22,4725.78
  region net 3V3: 4547.16,4813.28 4555.54,4835.78 4523.78,4835.78 4532.16,4813.28
  region net IO0: 4475.34,4820.78 4485.34,4820.78 4496.22,4835.78 4464.46,4835.78
  region net IO0: 4453.86,4862.2 4464.46,4835.78 4478.08,4869.8 4453.86,4876.34
  region net IO0: 4424.88,4916.02 4434.88,4916.02 4447.38,4931.02 4412.38,4931.02
  region net EN: 3315,4911.02 3325,4911.02 3337.5,4926.02 3309.76,4926.02
  region net D-: 4509.33,3568.26 4524.33,3567.36 4524.33,3579.17 4509.33,3578.26
  region net D+: 4580,3597.95 4575.51,3598.86 4575.51,3587.05 4580,3587.95
  region net D-: 4509.33,3617.63 4509.33,3607.63 4524.33,3606.73 4524.33,3618.54
  region net D+: 4582.2,3627.32 4582.2,3637.32 4575.51,3638.23 4575.51,3626.42
  region net D+: 4514.92,3627.32 4524.33,3626.42 4524.33,3638.23 4514.92,3637.32
  region net 3V3: 3129.29,4302.03 3116.21,4267.88 3126.03,4256.48 3159.63,4266.79
  region net IO32: 3413.5,4305.29 3391,4324.04 3391,4271.54 3413.5,4290.29
  region net $1N8242: 3760.46,3807.41 3760.46,3827.41 3730.46,3833.16 3730.46,3801.66
  region net 3V3: 3842.01,3872.45 3842.01,3892.45 3812.01,3898.33 3812.01,3866.58
  region net $1N8242: 3747.99,3807.41 3777.99,3807.26 3777.99,3839.01 3747.99,3827.41
  region net IO2: 4652.99,4122.79 4652.99,4112.79 4667.99,4107.26 4667.99,4135.29
  region net $1N8352: 4690,4207.45 4680,4207.45 4667.99,4198.33 4702.01,4198.33
  region net 3V3: 3239.9,4595.66 3257.5,4577.79 3272.5,4577.79 3290.1,4595.66
  region net 3V3: 3410.23,3820.29 3387.73,3839.04 3387.73,3786.79 3410.23,3805.29
  region net 3V3: 3309.82,3854.09 3325.73,3811.67 3362.86,3848.79 3320.43,3864.7
  region net 3V3: 3564.33,4707.72 3564.33,4697.72 3574.34,4685.22 3574.34,4720.22
  region net 3V3: 3679.51,4695.22 3679.51,4710.22 3657.01,4721.42 3657.01,4684.02
  region net EN: 3559.34,4647.72 3574.34,4635.22 3574.34,4670.22 3559.34,4657.72
  region net EN: 3672.01,4647.72 3672.01,4657.72 3657.01,4670.22 3657.01,4635.22
  region net IO32: 3551.84,4410.22 3551.84,4395.22 3574.34,4384.02 3574.34,4421.42
  region net IO2: 4228.71,4037.88 4228.71,4047.88 4213.71,4060.38 4213.71,4025.38
  region net IO0: 4380.66,4097.72 4380.66,4107.72 4365.66,4120.22 4365.66,4085.22
  region net IO4: 4267.99,4157.79 4267.99,4147.79 4282.99,4135.29 4282.99,4170.29
  region net IO16: 4267.99,4207.72 4267.99,4197.72 4282.99,4185.22 4282.99,4220.22
  region net IO17: 4267.99,4257.79 4267.99,4247.79 4282.99,4235.29 4282.99,4270.29
  region net IO5: 4267.99,4297.79 4282.99,4285.29 4282.99,4320.29 4267.99,4307.79
  region net IO18: 4267.99,4357.79 4267.99,4347.79 4282.99,4335.29 4282.99,4370.29
  region net IO19: 4267.99,4407.79 4267.99,4397.79 4282.99,4385.29 4282.99,4420.29
  region net IO21: 4267.99,4507.79 4267.99,4497.79 4282.99,4485.29 4282.99,4520.29
  region net RXD0: 4376.27,4561.65 4376.27,4575.79 4354.22,4571.42 4365.66,4534.02
  region net TXD0: 4376.27,4615.79 4376.27,4629.93 4350.08,4621.42 4365.66,4584.02
  region net IO22: 4269.93,4647.72 4282.99,4635.22 4282.99,4670.22 4269.93,4657.72
  region net VIN: 4254.35,3940.82 4254.35,3960.82 4224.35,3964.05 4224.35,3937.59
  region net VBUS: 4477.5,3436.91 4461.38,3414.41 4508.62,3414.41 4492.5,3436.91
  region net 5V: 4477.5,3304.8 4461.38,3288.42 4508.62,3288.42 4492.5,3304.8
  region net DTR: 4557.45,4581.1 4570.25,4580.59 4570.25,4591.61 4557.45,4591.1
  region net $1N4541: 4552.93,4630.5 4552.93,4620.5 4570.25,4619.99 4570.25,4631.01
  region net $1N4471: 4552.93,4650.2 4552.93,4640.2 4570.25,4639.69 4570.25,4650.71
  region net $1N4383: 4804.02,4600.8 4804.02,4610.8 4791.51,4611.31 4791.51,4600.29
  region net 5V: 4774.3,4565.59 4784.3,4565.59 4796.8,4584.57 4761.8,4584.57
  region net 3V3: 4720.27,4551.78 4720.27,4541.78 4738.44,4529.28 4738.44,4564.28
  region net 3V3: 4734.97,4527.82 4744.97,4527.82 4745.49,4534.58 4734.46,4534.58
  region net 3V3: 4739.97,4551.78 4721.8,4564.28 4721.8,4529.28 4739.97,4541.78
  region net D-: 4695.57,4517.26 4705.57,4517.26 4706.09,4534.58 4695.06,4534.58
  region net D+: 4675.87,4517.26 4685.87,4517.26 4686.39,4534.58 4675.36,4534.58
  region net VIN: 4264.28,3943.75 4284.36,3935.06 4319.79,3935.06 4280.04,3956.27
  region net VIN: 4349.79,3907.79 4349.79,3927.79 4319.79,3935.06 4319.79,3903.57
  region net 3V3: 3917.72,3872.45 3917.72,3892.45 3887.72,3896.1 3887.72,3864.6
  region net 3V3: 3822.28,3872.45 3887.72,3864.6 3887.72,3896.1 3822.28,3892.45
  region net 3V3: 4780.49,4473.4 4765.49,4473.4 4756.26,4450.9 4789.72,4450.9
  region net 3V3: 4799.7,4389.97 4805.63,4405.25 4789.72,4450.9 4759.49,4403.66
  region net $1N8352: 4741.26,4243.3 4741.26,4233.3 4756.26,4220.8 4756.26,4255.8
  region net $1N21123: 3563.68,3330.6 3540.92,3309.44 3540.92,3266.14 3581,3319.63
  region net $1N20998: 3457.78,3457.79 3457.78,3447.79 3472.78,3436.91 3472.78,3468.4
  region net $1N21037: 3290.34,3444.8 3279.46,3429.8 3311.22,3429.8 3300.34,3444.8
  region net $1N20998: 3375.2,3440.41 3346.92,3429.8 3370.54,3403.92 3381.14,3432.2
  region net 3V3: 3988.03,3872.45 4013.89,3882.22 4022.89,3917.45 3982.67,3892.45
  region net D+: 4485.99,4139.85 4490,4127.38 4500,4127.38 4504.01,4139.85
  region net D+: 4502.94,4213.79 4509.14,4217.79 4509.14,4227.79 4502.94,4231.8
  region net $1N21037: 3709.92,3756.54 3725.5,3757.79 3725.5,3777.79 3709.92,3779.04
  region net $1N21037: 3355.08,3509.04 3339.5,3507.79 3339.5,3487.79 3355.08,3486.54
  region net VIN: 4360.08,3929.04 4344.5,3927.79 4344.5,3907.79 4360.08,3906.54
  region net 5V: 4788.52,4551.24 4784.3,4563.48 4774.3,4562.89 4770.56,4550.19
  region net 5V: 4603.02,4503.54 4597.04,4491.9 4604.11,4484.83 4615.75,4490.81
  region net RTS: 4477.94,4723.79 4490.4,4727.79 4490.4,4737.79 4477.94,4741.79
  region net DTR: 4477.94,4533.79 4490.4,4537.79 4490.4,4547.79 4477.94,4551.79
  region net IO0: 4533.02,4488.54 4527.04,4476.9 4534.11,4469.83 4545.75,4475.81
  region net IO0: 4545.75,4759.77 4534.11,4765.75 4527.04,4758.68 4533.02,4747.04
  region net EN: 3707.01,4661.74 3694.57,4657.72 3694.63,4647.72 3707.12,4643.74
  region net $1N569: 4401,4019.85 4405,4007.39 4415,4007.39 4419,4019.85
  region net $1N569: 4537.94,4073.79 4550.4,4077.79 4550.4,4087.79 4537.94,4091.79
  region net $1N568: 4393.02,3783.54 4387.04,3771.9 4394.11,3764.83 4405.75,3770.81
  region net $1N567: 4396,3684.85 4400,3672.39 4410,3672.39 4414,3684.85
  region net $1N568: 4546.98,3907.04 4552.96,3918.68 4545.89,3925.75 4534.25,3919.77
  region net $1N567: 4546.98,3827.04 4550.56,3836.28 4543.49,3843.35 4534.25,3839.77
  region net 3V3: 4825.75,4814.77 4815.88,4822.52 4805.27,4811.91 4813.02,4802.04
  region net 3V3: 4775.75,4504.77 4764.11,4510.75 4757.04,4503.68 4763.02,4492.04
  region net 3V3: 4764.8,4486.47 4765.49,4473.71 4780.49,4471.17 4782.54,4483.46
  region net IO4: 4187.94,4143.79 4200.4,4147.79 4200.4,4157.79 4187.94,4161.79
  region net IO22: 4191.98,4562.04 4197.96,4573.68 4190.89,4580.75 4179.25,4574.77
  region net IO21: 4187.94,4493.79 4200.4,4497.79 4200.4,4507.79 4187.94,4511.79
  region net IO19: 4187.94,4393.79 4200.4,4397.79 4200.4,4407.79 4187.94,4411.79
  region net IO18: 4187.94,4343.79 4200.4,4347.79 4200.4,4357.79 4187.94,4361.79
  region net IO5: 4187.94,4293.79 4200.4,4297.79 4200.4,4307.79 4187.94,4311.79
  region net IO17: 4187.94,4243.79 4200.4,4247.79 4200.4,4257.79 4187.94,4261.79
  region net IO16: 4187.88,4193.74 4200.37,4197.72 4200.43,4207.72 4187.99,4211.74
  region net 3V3: 3714.25,4690.81 3724.12,4683.06 3734.73,4693.67 3726.98,4703.54
  region net 3V3: 3707.01,4711.74 3694.55,4710.22 3694.65,4695.22 3707.12,4693.74
  region net 3V3: 4548.77,4810.98 4547.16,4823.4 4532.16,4822.98 4530.78,4810.47
  region net IO2: 4398.02,4083.54 4392.04,4071.9 4399.11,4064.83 4410.75,4070.81
  region net IO2: 4537.94,4108.79 4550.4,4112.79 4550.4,4122.79 4537.94,4126.79
Bottom Layer:
  region net VIN: 3430,3332.79 3540,3332.79 3540,3427.79 3430,3427.79
  region net VIN: 3430,3263.97 3484.99,3263.97 3484.99,3339.37 3430,3339.37
  region net $1N5682: 4056.02,4612.79 4056.02,4602.79 4071.02,4596.61 4071.02,4624.17
  region net DTR: 4135.24,4680.19 4135.24,4690.19 4120.24,4698.97 4120.24,4671.41
  region net DTR: 4056.02,4692.79 4056.02,4682.79 4071.02,4671.41 4071.02,4698.97
  region net IO0: 4213.98,4652.79 4198.98,4661.57 4198.98,4634.01 4213.98,4642.79
  region net $1N5646: 3903.98,4680.19 3903.98,4690.19 3888.98,4698.97 3888.98,4671.41
  region net RTS: 3903.98,4615.39 3888.98,4624.17 3888.98,4596.61 3903.98,4605.39
  region net RTS: 3832.91,4634.78 3839.76,4610.25 3875.34,4624.17 3847.05,4634.78
  region net EN: 3746.02,4647.79 3761.02,4635.29 3761.02,4661.57 3746.02,4657.79
  region net DTR: 4040.54,4692.79 4025.54,4704.8 4025.54,4670.78 4040.54,4682.79
  region net $1N5646: 3919.46,4680.19 3934.46,4670.78 3934.46,4702.69 3919.46,4690.19
  region net RTS: 3919.46,4615.39 3919.46,4605.39 3934.46,4592.89 3934.46,4624.8
  region net $1N5682: 4040.54,4612.79 4025.54,4624.8 4025.54,4590.78 4040.54,4602.79
  region net VIN: 3115.63,4419.02 3126.23,4408.42 3168.66,4424.33 3131.54,4461.45
  region net IO19: 3298.4,4455.7 3308.76,4494.48 3301.69,4501.55 3262.9,4491.19
  region net IO18: 3362.9,4424.39 3401.69,4414.03 3408.76,4421.1 3398.4,4459.89
  region net IO16: 3398.4,3975.7 3408.76,4014.48 3401.69,4021.55 3362.9,4011.19
  region net IO17: 3298.4,3975.7 3308.76,4014.48 3301.69,4021.55 3262.9,4011.19
  region net VIN: 3131.55,3978.71 3120.12,3941.86 3131.1,3931.62 3168.27,3944.49
  region net 3V3: 3298.4,4615.7 3310.53,4652.71 3299.92,4663.32 3262.9,4651.19
  region net IO21: 3362.9,4584.39 3401.69,4574.03 3408.76,4581.1 3398.4,4619.89
  region net IO22: 3487.13,4592.69 3521.89,4612.79 3521.89,4622.79 3487.13,4642.89
  region net IO4: 3287.44,3813.55 3298.88,3849.6 3292.34,3857.2 3257.1,3848.79
  region net IO5: 3502,4181.86 3473.72,4171.26 3498.46,4146.51 3509.07,4174.79
  region net VIN: 3131.6,4139.89 3119.47,4102.87 3130.08,4092.26 3167.1,4104.39
  region net VIN: 3448.76,3331.89 3430.01,3295.21 3482.51,3295.21 3463.76,3331.89
  region net D+: 4504.01,4155.73 4500,4168.2 4490,4168.2 4485.99,4155.73
  region net D+: 4485.99,4214.85 4490,4202.38 4500,4202.38 4504.01,4214.85
  region net $1N21037: 3685.15,3769.94 3674.62,3758.27 3687.62,3742.98 3699.73,3752.79
  region net $1N21037: 3374.92,3486.54 3390.5,3487.79 3390.5,3507.79 3374.92,3509.04
  region net VIN: 4358.75,3907.87 4360,3892.29 4380,3892.29 4381.25,3907.87
  region net 5V: 4768.02,4543.54 4762.04,4531.9 4769.11,4524.83 4780.75,4530.81
  region net 5V: 4622.94,4493.79 4635.4,4497.79 4635.4,4507.79 4622.94,4511.79
  region net RTS: 4462.06,4741.79 4449.6,4737.79 4449.6,4727.79 4462.06,4723.79
  region net DTR: 4462.06,4551.79 4455.86,4547.79 4455.86,4537.79 4462.06,4533.79
  region net IO0: 4537.06,4496.79 4524.6,4492.79 4524.6,4482.79 4537.06,4478.79
  region net IO0: 4554,4495.73 4550,4508.19 4540,4508.19 4536,4495.73
  region net IO0: 4536,4739.85 4540,4727.39 4550,4727.39 4554,4739.85
  region net EN: 3722.94,4643.79 3735.4,4647.79 3735.4,4657.79 3722.94,4661.79
  region net $1N569: 4421.98,4027.04 4427.96,4038.68 4420.89,4045.75 4409.25,4039.77
  region net $1N569: 4522.06,4091.79 4509.6,4087.79 4509.6,4077.79 4522.06,4073.79
  region net $1N568: 4416.98,3782.04 4422.96,3793.68 4415.89,3800.75 4404.25,3794.77
  region net $1N567: 4416.67,3695.6 4421.45,3707.17 4412.2,3712.06 4400.75,3704.01
  region net $1N568: 4523.78,3912.04 4515.73,3900.59 4520.62,3891.34 4532.19,3896.12
  region net $1N567: 4523.02,3828.54 4517.04,3816.9 4524.11,3809.83 4535.75,3815.81
  region net 3V3: 4816,4794.85 4817.5,4782.39 4832.5,4782.39 4834,4794.85
  region net 3V3: 4786.98,4492.04 4794.73,4501.91 4784.12,4512.52 4774.25,4504.77
  region net IO4: 4172.06,4161.79 4159.6,4157.79 4159.6,4147.79 4172.06,4143.79
  region net VIN: 3500.08,3414.04 3484.5,3410.29 3484.5,3395.29 3500.08,3391.54
  region net VIN: 3445.08,3414.04 3429.5,3410.29 3429.5,3395.29 3445.08,3391.54
  region net VIN: 3464.92,3391.54 3480.5,3395.29 3480.5,3410.29 3464.92,3414.04
  region net IO22: 4172.06,4571.79 4159.6,4567.79 4159.6,4557.79 4172.06,4553.79
  region net IO21: 4180.75,4514.77 4169.11,4520.75 4162.04,4513.68 4168.02,4502.04
  region net IO19: 4172.06,4411.79 4159.6,4407.79 4159.6,4397.79 4172.06,4393.79
  region net IO18: 4172.06,4361.79 4159.6,4357.79 4159.6,4347.79 4172.06,4343.79
  region net IO5: 4172.06,4311.79 4159.6,4307.79 4159.6,4297.79 4172.06,4293.79
  region net IO17: 4172.06,4261.79 4159.6,4257.79 4159.6,4247.79 4172.06,4243.79
  region net IO16: 4172.06,4211.79 4159.6,4207.79 4159.6,4197.79 4172.06,4193.79
  region net 3V3: 3707.06,4711.79 3694.6,4710.29 3694.6,4695.29 3707.06,4693.79
  region net 3V3: 3726.98,4702.04 3734.73,4711.91 3724.12,4722.52 3714.25,4714.77
  region net 3V3: 4528.02,4803.54 4520.27,4793.67 4530.88,4783.06 4540.75,4790.81
  region net IO2: 4421.98,4082.04 4427.96,4093.68 4420.89,4100.75 4409.25,4094.77
  region net IO2: 4522.06,4126.79 4509.6,4122.79 4509.6,4112.79 4522.06,4108.79

## Silkscreen, mask and mechanical layers (free items; w line width, h text height)
Top Silkscreen Layer:
  text "-" at 3085,3644.15 h78.45
  text "+" at 3355,3644.15 h78.45